# Altium PCB power_supply_pcb.PcbDoc
Units mm, origin at the board's own origin, x right, y up, seen from the top; angles counter-clockwise.
Board outline 77.5 x 35 mm, 2 copper layers (Top Layer, Bottom Layer), stack 1.5 mm thick; 18 components, 11 nets, 50 pads, 0 vias.
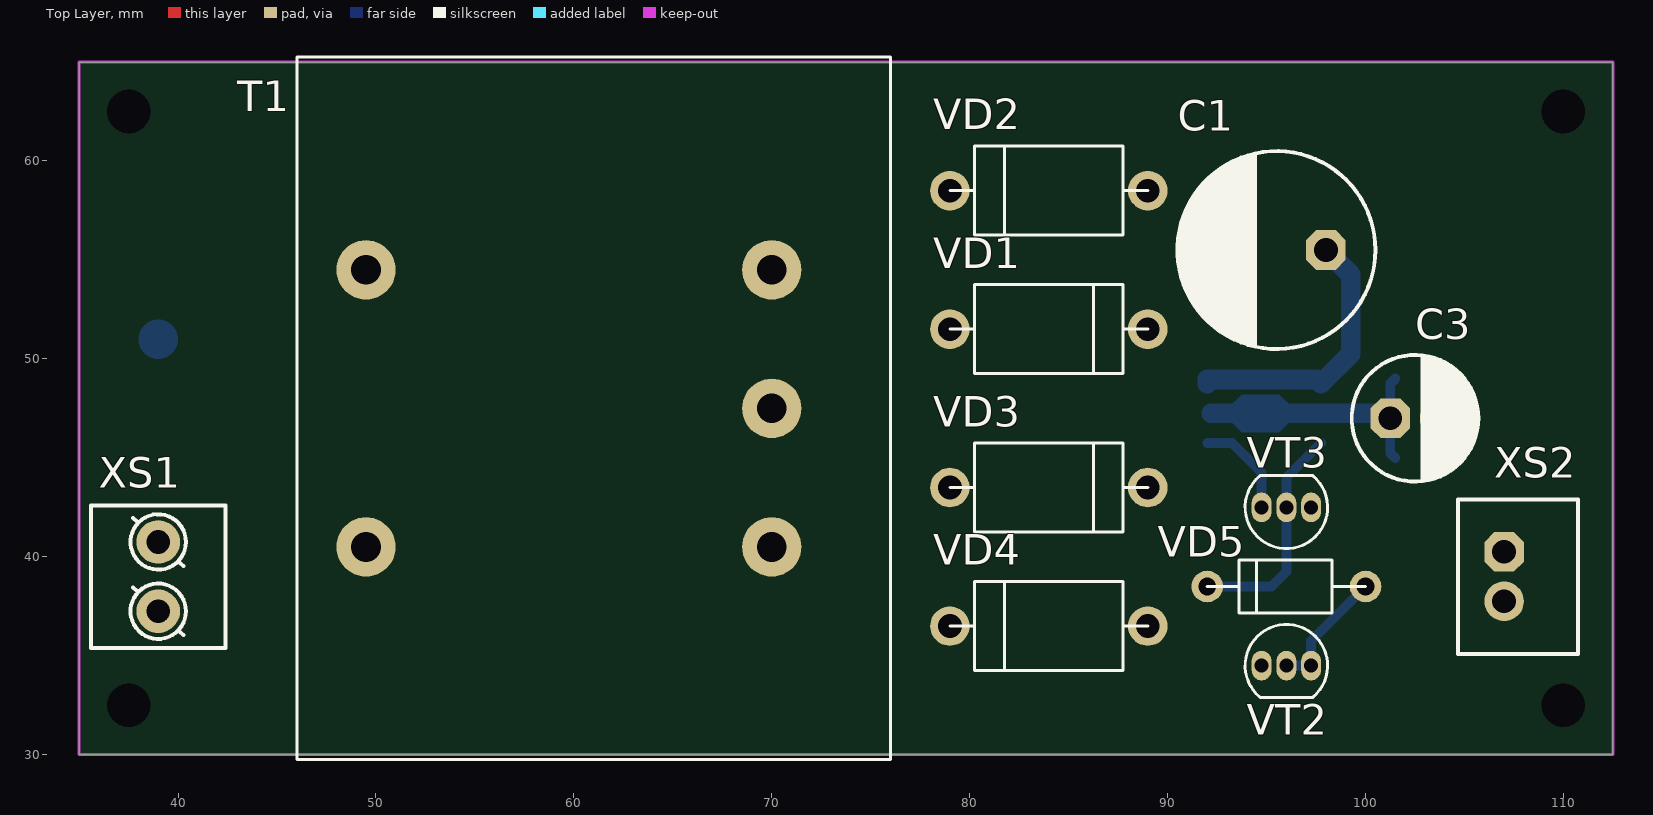
[diagram p0: Top Layer view]
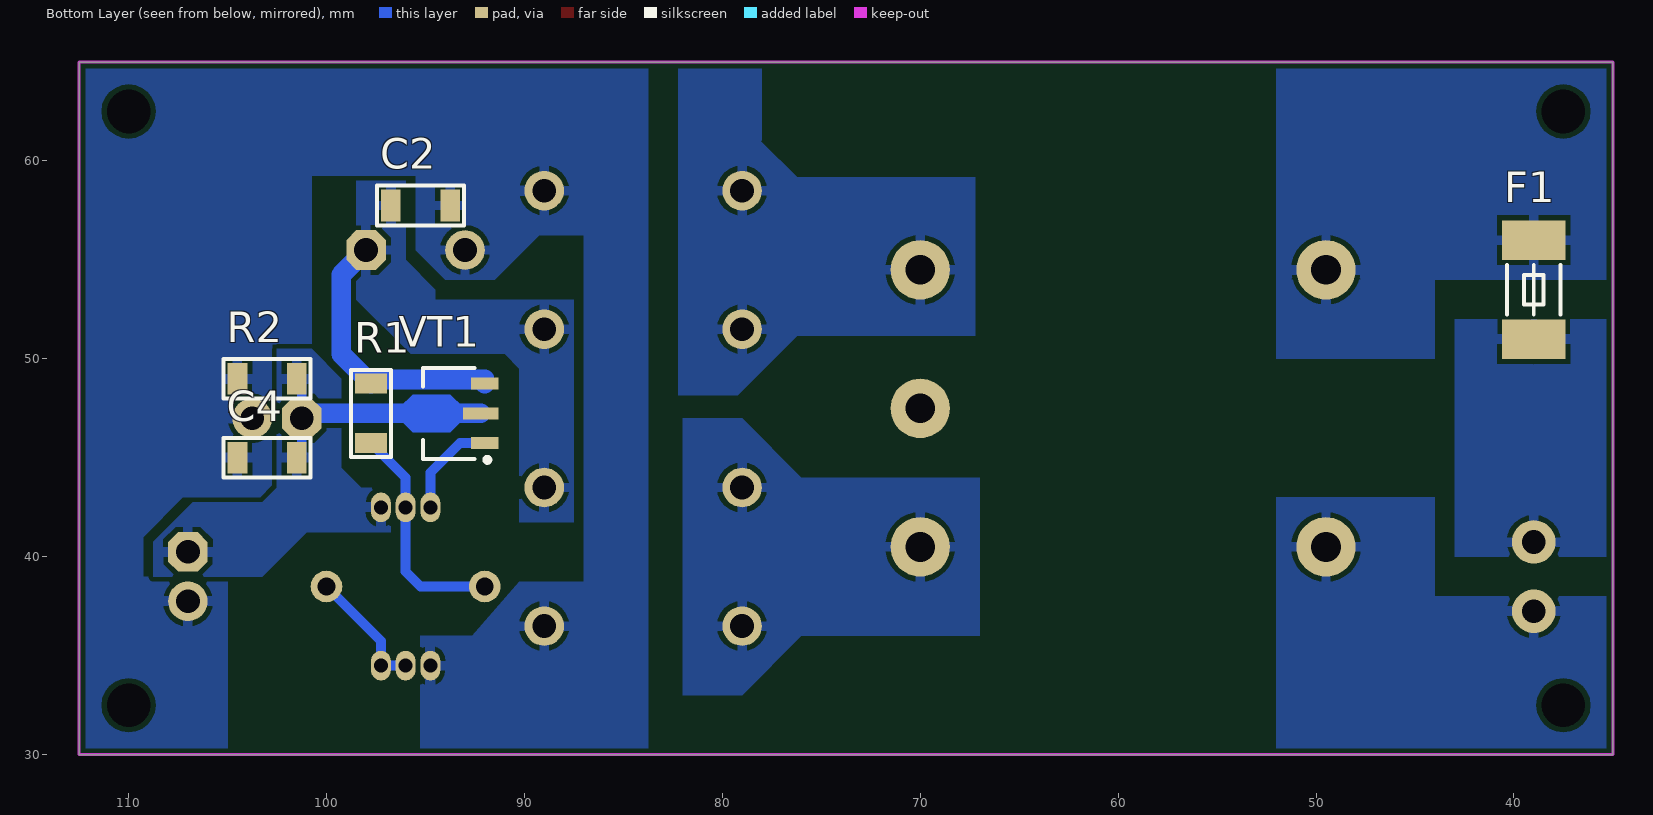
[diagram p1: Bottom Layer view, seen from below]
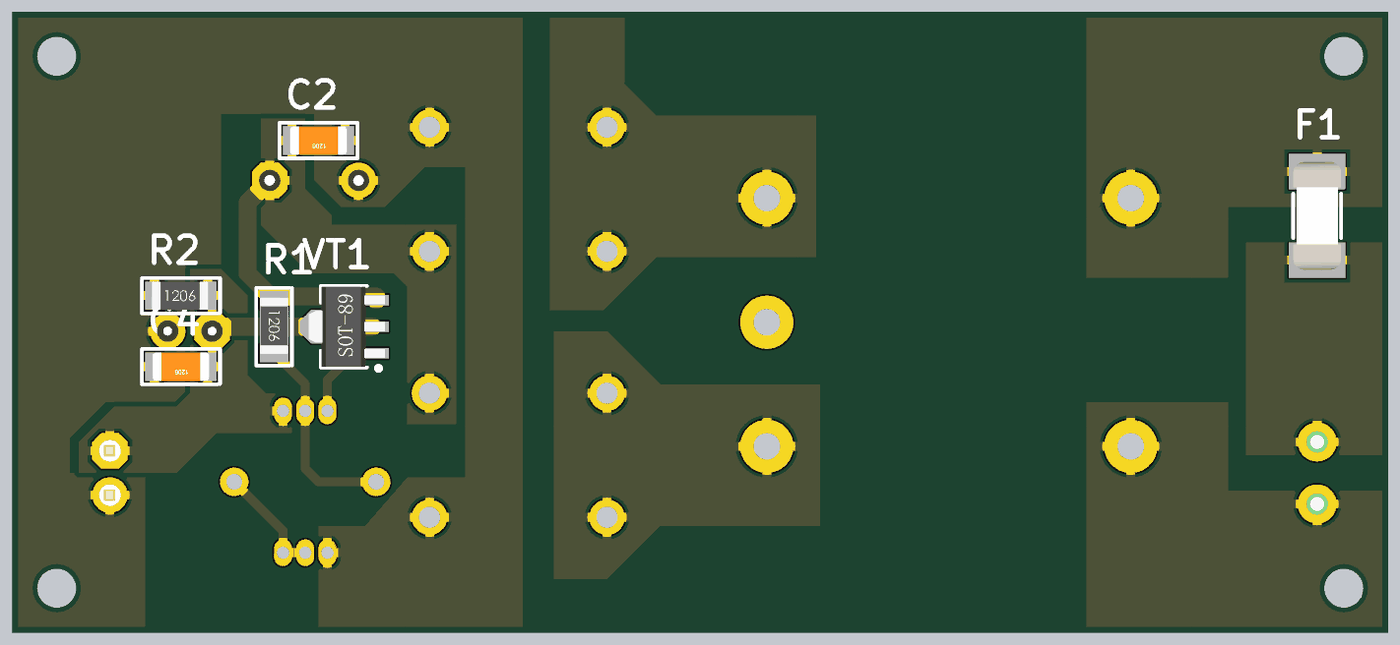
[diagram p2: 3D render of the assembled board from below, using the file's embedded part models]

## Layer stack, top to bottom
Top Layer: signal copper (thickness not stored)
Dielectric 1: dielectric 1.5, FR-4, Dk 4.8
Bottom Layer: signal copper (thickness not stored)

## Board outline
35,30 112.5,30 112.5,65 35,65

## Design rules (kind name [scope] priority, off if disabled: settings)
Clearance [All] p1: gap=0.254 ignorepadtopadclearanceinfootprint=TRUE except(0: Arc-Hole Track-Hole SMDPad-Hole THPad-Hole Via-Hole Fill-Hole Poly-Hole Region-Hole Text-Hole)
ComponentClearance [All] p1 off: gap=0.254 collisioncheckmode=3 verticalgap=0.254 showdistances=FALSE
PlaneConnect [All] p1: planeconnectstyle=Relief reliefexpansion=0.508 reliefentries=4 reliefconductorwidth=0.5 reliefairgap=0.254
PolygonConnect [All] p1: connectstyle=Relief reliefconductorwidth=0.5 reliefentries=4 polygonreliefangle="90 Angle" airgapwidth=0.254
RoutingVias [All] p1: holewidth=0.711 width=1.27 viastyle="Through Hole" minholewidth=0.711 minwidth=1.27 maxholewidth=0.711 maxwidth=1.27
SolderMaskExpansion [All] p1: expansion=0.102
UnpouredPolygon [All] p1: allowunpoured=TRUE allowshelved=TRUE
Width [All] p1: maxlimit=2 minlimit=0.5 preferedwidth=1 minimp=50.000000 maximp=50.000000 favimp=50.000000
27 further rules are at their usual default settings.

## Classes and differential pairs
component class power_supply: C1 C2 C3 C4 F1 R1 R2 VD1 VD2 VD3 VD4 VD5 VT1 VT2 VT3 XS1 XS2

## Components (designator, comment, footprint, x,y, rotation, side; value= is the part's Value field where it differs from the comment)
C1 "1000 мкФ" "CAP: D10C5H20" 95.5,55.5 r180 top
C2 "100 нФ" "CAP: 1206" 95.25,57.75 r0 bottom
C3 "220 мкФ" "CAP: D6.3C2.5H11" 102.5,47 r0 top
C4 "100нФ" "CAP: 1206" 103,45 r0 bottom
F1 "0.5 А" "FUSE: 0679H (BelFuse)" 39,51 r90 bottom
R1 "330 Ом" "RES: 1206" 97.75,47.25 r270 bottom
R2 "1 кОм" "RES: 1206" 103,49 r180 bottom
T1 "Trans_1_1" 15v_0.7A_trans 70,47.5 r90 top
VD1 "1n5400" 1n5400-1n5408 84,51.5 r0 top
VD2 "1n5400" 1n5400-1n5408 84,58.5 r180 top
VD3 "1n5400" 1n5400-1n5408 84,43.5 r0 top
VD4 "1n5400" 1n5400-1n5408 84,36.5 r180 top
VD5 "1n4742" 1n4728-1n4764 96,38.5 r180 top
VT1 "2SB1132T100Q" SOT89 93.8,47.25 r0 bottom
VT2 "2n4401" TO-92 96,34.5 r0 top
VT3 "2n4401" TO-92 96,42.5 r180 top
XS1 "X2" "CON: DG350-3.5-02P" 39,39 r270 top
XS2 "X2" "CON: CWF-2" 107,39 r270 top

## Footprints (in the part's own frame and the unit in brackets; to place one, negate y for a bottom-side part, rotate by r counter-clockwise, add the part's x,y. Pads: shape width x height; smd on the part's side, far side on the other; paste and mask are expansions set on the pad)
1n4728-1n4764 [mm]
  round 1.6 hole 0.9: 1(-4,0) 2(4,0)
  silkscreen extent -4,-1.35 4,1.35
1n5400-1n5408 [mm]
  round 2 hole 1.2: 1(-5,0) 2(5,0)
  silkscreen extent -5,-2.25 5,2.25
15v_0.7A_trans [mm]
  round 3 hole 1.5: 1(7,20.5) 2(-7,20.5) 3(7,0) 4(0,0) 5(-7,0)
  silkscreen extent -17.75,-6 17.75,24
"CAP: 1206" [mm]
  rect 1x1.6 smd: 1(-1.5,0) 2(1.5,0)
  silkscreen extent -2.2,-1 2.2,1, body extent -1.6,-0.8 1.6,0.8, height 1
"CAP: D6.3C2.5H11" [mm]
  oct 2x2 hole 1.2: 1(-1.25,0)
  round 2 hole 1.2: 2(1.25,0)
  silkscreen extent -3.2,-3.2 3.2,3.2, body extent -3.4,-3.4 3.4,3.4, height 12.5
"CAP: D10C5H20" [mm]
  oct 2x2 hole 1.2: 1(-2.5,0)
  round 2 hole 1.2: 2(2.5,0)
  silkscreen extent -5,-5 5,5, body extent -5.25,-5.25 5.25,5.25, height 22
"CON: CWF-2" [mm]
  oct 2x2 hole 1.2: 1(-1.25,0)
  round 2 hole 1.2: 2(1.25,0)
  round 0.5 on Top Overlay: ""(-4.375,-2.15)
  round 0.5 on Mech1: ""(-3.2,-1.7)
  silkscreen extent -3.9,-2.32 3.9,3.72, body extent -3.75,-2.18 3.75,3.57, height 7
"CON: DG350-3.5-02P" [mm]
  round 2.2 hole 1.2: 1(-1.75,0) 2(1.75,0)
  round 0.5 on Top Overlay: ""(-3.1,-2.9)
  silkscreen extent -3.6,-3.4 3.6,3.4, body extent -4,-3.4 4,3.4, height 8.4
"FUSE: 0679H (BelFuse)" [mm]
  rect 2x3.2 smd mask+0.075: 1(0,0) 2(5,0)
  silkscreen extent 1.25,-1.35 3.75,1.35, body extent -0.55,-1.35 5.55,1.34, height 2.69
"RES: 1206" [mm]
  rect 1x1.6 smd: 1(-1.5,0) 2(1.5,0)
  silkscreen extent -2.2,-1 2.2,1, body extent -1.65,-0.8 1.55,0.8, height 0.47
SOT89 [mm]
  rect 1.4x0.6 smd: 1(-1.8,1.5) 3(-1.8,-1.5)
  rect 1.8x0.6 smd: 2(-1.6,0)
  round 0.5 on Mech1: ""(-1.8,1.8)
  Top Layer region: -0.7,0.3 -0.05,0.95 1.85,0.95 2.5,0.3 2.5,-0.3 1.85,-0.95 -0.05,-0.95 -0.7,-0.3
  silkscreen extent -2.05,-2.3 1.32,2.47, body extent -2.3,-2.25 2,2.25, height 1.51
TO-92 [mm]
  oval 1x1.5 hole 0.7: 1(-1.25,0) 2(0,0) 3(1.25,0)
  silkscreen extent -2.08,-1.6 2.08,2.08

## Part data
C1 C3: library part C_pol
C2 C4: library part C_const
F1: library part fuse
R1 R2: library part Res
VD1 VD2 VD3 VD4: library part VD
VD5: library part zener
VT1: library part pnp
VT2 VT3: library part npn
XS1: =address1=A3-XS1:1, =address2=A3-XS1:1, circuit1=~220В, circuit2=~220В
XS2: =address1=A3-XS2:1, =address2=A3-XS2:2, circuit1=+12В, circuit2=GND

## Free pads (board coordinates)
  round 0 hole 2.2 unplated: 5(110,62.5) 6(110,32.5) 7(37.5,62.5) 8(37.5,32.5)

## Nets (pads, with @x,y where several pads share a name; then routed paths per layer and width w, separated by ;. In a path a pad name is that pad's centre, name@x,y a point inside that pad or via, vN(x,y) a via of type N, cw(c..) or ccw(c..) an arc to the next point about the centre after c; other vN are vias at no path point)
NetC1_1: C1.1 C2.2 R1.1 VD1.2 VD3.2 VT1.3 | length 13.9
  Bottom Layer w1: VT1.3 92,48.954 97.546,48.954 R1.1 99.25,50.25 99.25,54.25 C1.1
NetC1_2: C1.2 C2.1 C3.2 C4.2 R2.1 VD2.1 VD4.1 VT2.1 XS2.2
NetC3_1: C3.1 C4.1 R2.2 VT1.2 VT3.1 XS2.1 | length 13.1
  Bottom Layer w0.5: C4.1 101.25,45.25 C3.1 101.25,48.75 R2.2
  Bottom Layer w1: VT1.2 100.75,47.25 C3.1@101,47
NetF1_1: F1.1 XS1.1 | length 0
NetF1_2: F1.2 T1.1
NetR1_2: R1.2 VD5.2 VT3.2 | length 11.5
  Bottom Layer w0.5: VD5.2 95.25,38.5 96,39.25 VT3.2 96,44 R1.2
NetT1_2: T1.2 XS1.2
NetT1_3: T1.3 VD1.1 VD2.2
NetT1_4: T1.5 VD3.1 VD4.2
NetVD5_1: VD5.1 VT2.2 VT2.3 | length 6.4
  Bottom Layer w0.5: VT2.2 VT2.3 97.25,35.75 VD5.1
NetVT1_1: VT1.1 VT3.3 | length 5.1
  Bottom Layer w0.5: VT1.1 93.25,45.75 94.746,44.254 VT3.3@94.746,42.5
pads on no net: T1.4 VT1. XS1. XS2.

## Polygon pours and split planes (outlines as drawn)
NetT1_3 on Bottom Layer "Bottom Layer-NetT1_3 2" (solid, pour order 62): 67.222,51.173 67.222,59.173 76.222,59.173 78.049,61 82.222,61 82.222,48.173 79.222,48.173 76.222,51.173
NetT1_4 on Bottom Layer "Bottom Layer-NetT1_4 2" (solid, pour order 60): 67,36 67,44 76,44 79,47 82,47 82,33 79,33 76,36
NetF1_2 on Bottom Layer "Bottom Layer-NetF1_2 1" (solid, pour order 58): 44,54 44,50 52,50 52,54
NetF1_2 on Bottom Layer "Bottom Layer-NetF1_2" (solid, pour order 12): 35,54 43,54 52,54 52,65 35,65
NetT1_2 on Bottom Layer "Bottom Layer-NetT1_2" (solid, pour order 10): 35,30 52,30 52,43 44,43 44,38 35,38
NetF1_1 on Bottom Layer "Bottom Layer-NetF1_1" (solid, pour order 8): 35,40 43,40 43,52 35,52
NetC3_1 on Bottom Layer "Bottom Layer-NetC3_1" (solid, pour order 46): 99.25,46 99.25,44.5 98.25,43.5 96.75,43.5 96.75,41.25 101,41.25 103.25,39 108.75,39 108.75,40.75 106.75,42.75 103.25,42.75 102.5,43.5 102.5,50.5 100.75,50.5 99.25,49
NetC1_2 on Bottom Layer "Bottom Layer-NetC1_2 3" (solid, pour order 48): 89.25,56.25 91.5,54 94,54 95.5,55.5 95.5,59.25 100.75,59.25 100.75,50.75 102.75,50.75 102.75,43.5 103.25,43 107.25,43 109.25,41 109.25,39 105,39 105,30 112.5,30 112.5,65 89.25,65
NetC1_2 on Bottom Layer "Bottom Layer-NetC1_2 5" (solid, pour order 70): 95.25,33 95.25,30 83.75,30 83.75,33
NetT1_4 on Bottom Layer "Bottom Layer-NetT1_4" (solid, pour order 68): 95.25,33
NetT1_4 on Bottom Layer "Bottom Layer-NetT1_4 1" (solid, pour order 66): 95.25,33
NetT1_3 on Bottom Layer "Bottom Layer-NetT1_3 1" (solid, pour order 64): 78.049,61 78,61.049 78,65 82.222,65 82.222,61
NetC1_2 on Bottom Layer "Bottom Layer-NetC1_2" (solid, pour order 56): 92.25,36 95.25,36 95.25,33 92.25,33
NetC1_2 on Bottom Layer "Bottom Layer-NetC1_2 1" (solid, pour order 54): 92.875,35.875
NetC1_2 on Bottom Layer "Bottom Layer-NetC1_2 2" (solid, pour order 52): 92.75,35.75
NetC1_1 on Bottom Layer "Bottom Layer-NetC1_1" (solid, pour order 44): 95.75,46.75
NetC1_1 on Bottom Layer "Bottom Layer-NetC1_1 1" (solid, pour order 42): 95,46.5
NetC1_1 on Bottom Layer "Bottom Layer-NetC1_1 2" (solid, pour order 40): 95.975,46.625
NetC1_1 on Bottom Layer "Bottom Layer-NetC1_1 3" (solid, pour order 38): 96.3,46.95
NetC1_1 on Bottom Layer "Bottom Layer-NetC1_1 4" (solid, pour order 36): 96.3,46.95
NetC1_1 on Bottom Layer "Bottom Layer-NetC1_1 5" (solid, pour order 34): 87.5,41.75 87.5,53 94.5,53 94.5,53.5 96,55 96,59 98.5,59 98.5,53 95.75,50.25 91,50.25 90.25,49.5 90.25,41.75
NetC1_2 on Bottom Layer "Bottom Layer-NetC1_2 4" (solid, pour order 32): 95.25,33 90.25,38.75 87,38.75 87,56.25 89.25,56.25 90.5,57.5 90.5,59.5 89.25,65 83.75,65 83.75,33
no net on Bottom Layer "Bottom Layer-No Net" (solid, pour order 16): 89,34.5
NetT1_3 on Bottom Layer "Bottom Layer-NetT1_3" (solid, pour order 2): 84,33.5

## Keep-outs
Keep-Out Layer:
  the board outline again, w0.15